# Altium PCB H_bridge_PCB.PcbDoc
Units mm, origin at the board's own origin, x right, y up, seen from the top; angles counter-clockwise.
Board outline 95.88 x 101.6 mm, 2 copper layers (Top Layer, Bottom Layer); 43 components, 40 nets, 147 pads, 6 vias.
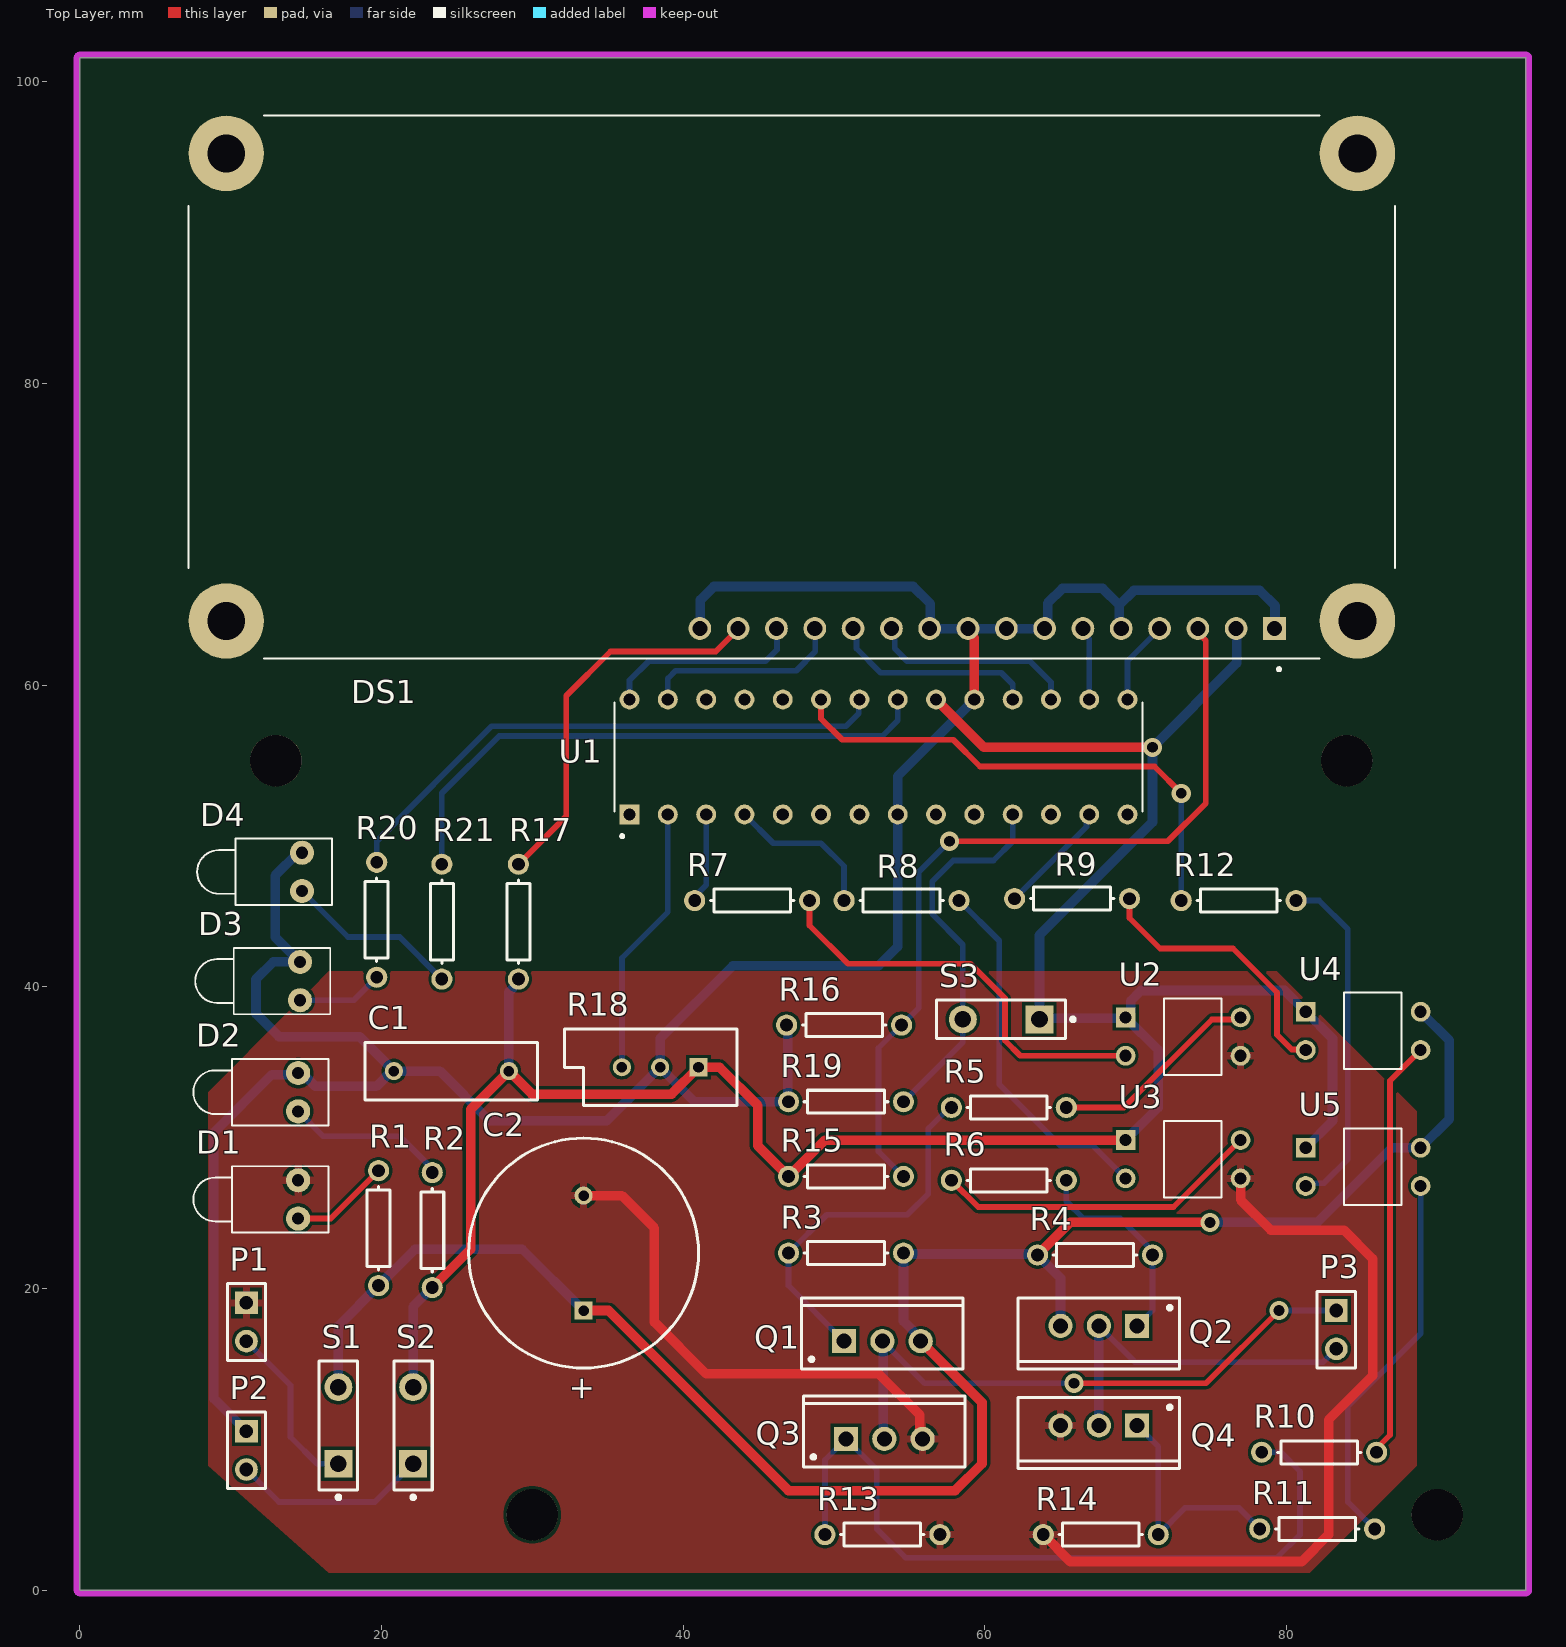
[diagram p0: Top Layer view]
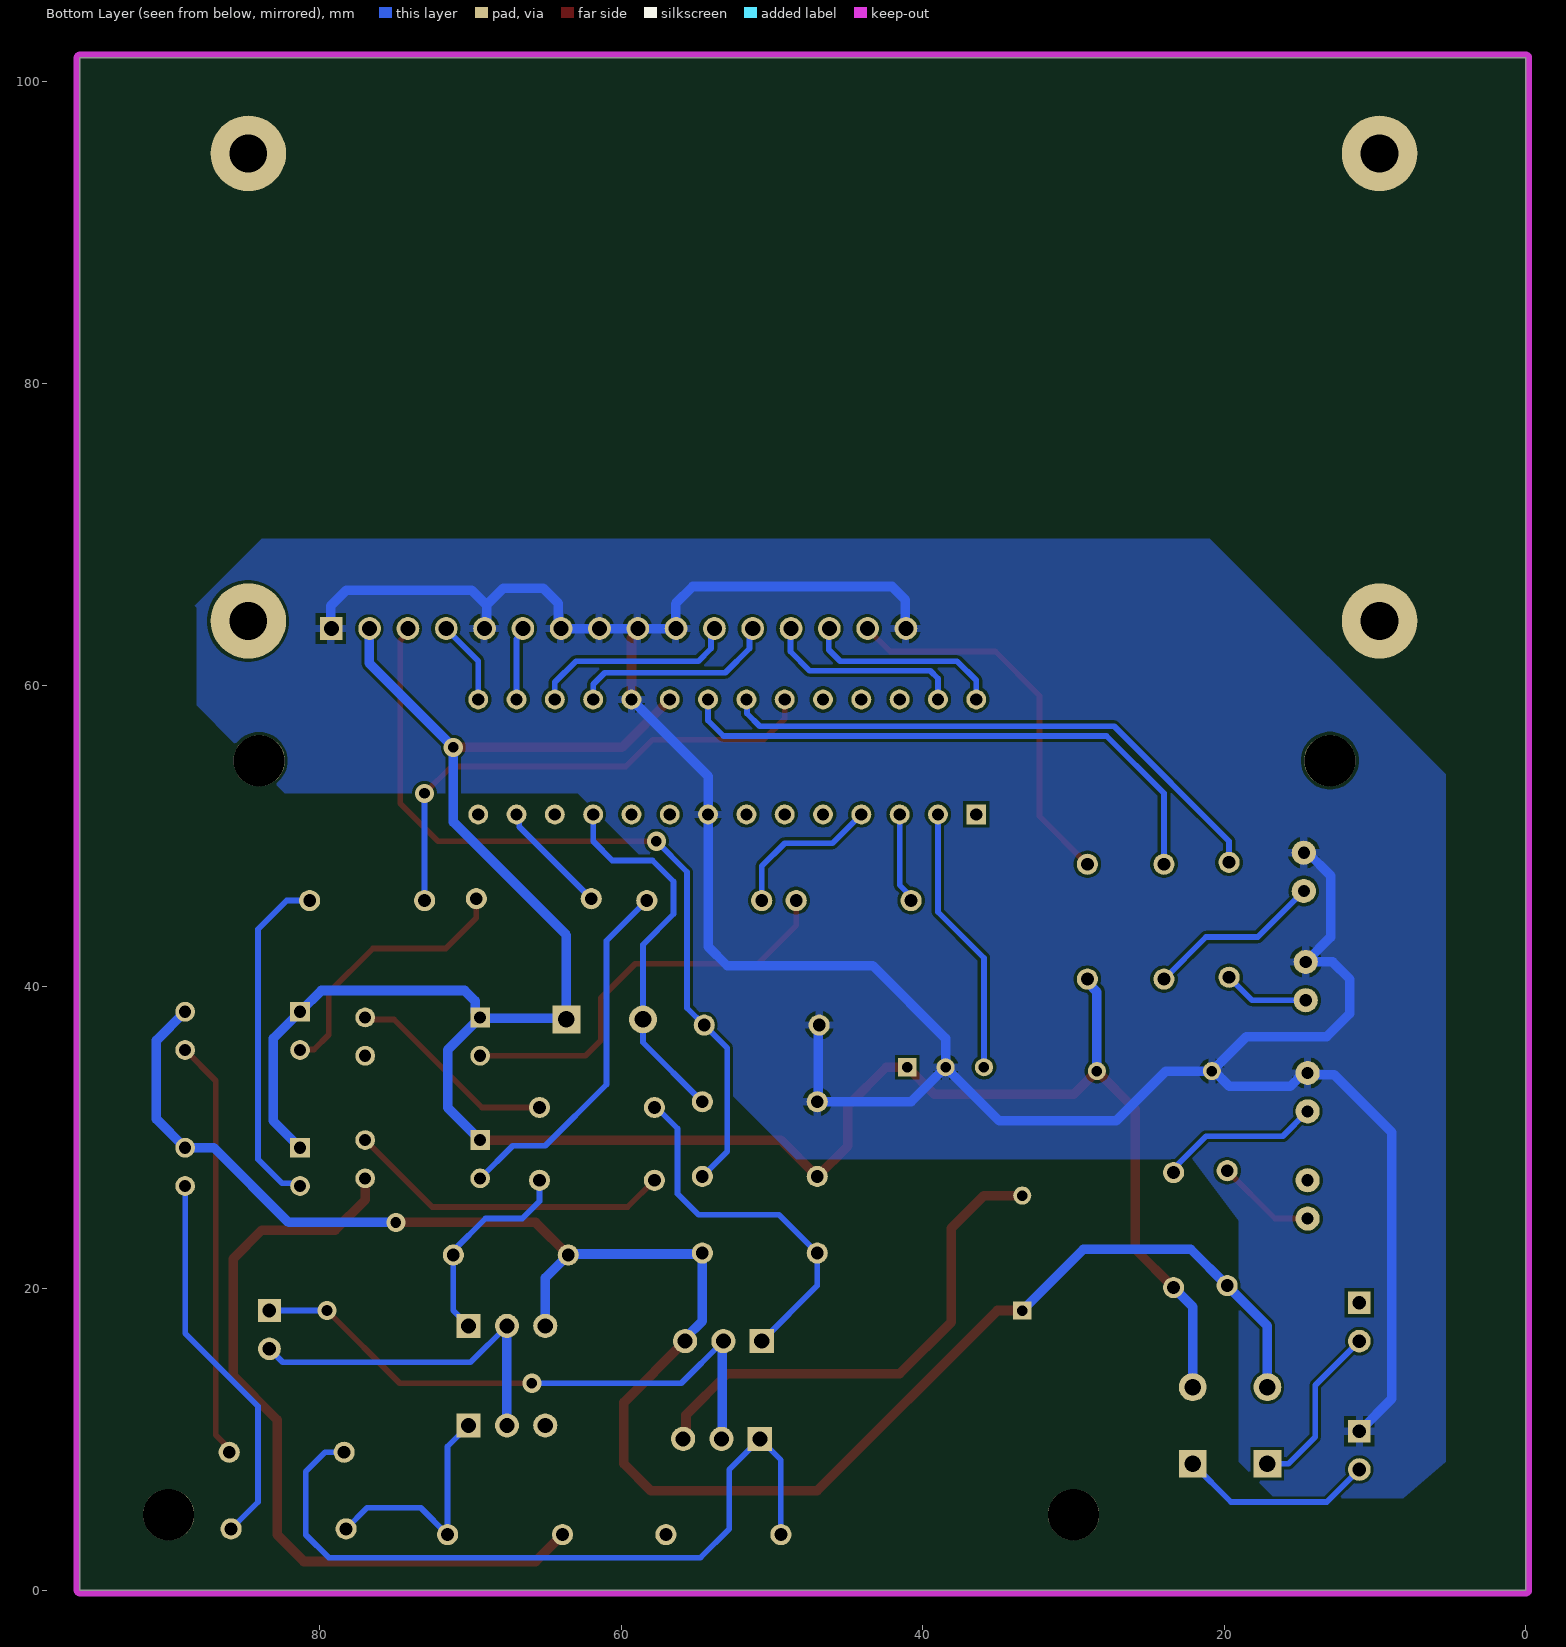
[diagram p1: Bottom Layer view, seen from below]

## Layer stack, top to bottom
Top Solder: solder mask 0.0102, Solder Resist, Dk 3.5
Top Layer: signal copper 0.0356
Dielectric 1: dielectric 0.32, FR-4, Dk 4.8
Bottom Layer: signal copper 0.0356
Bottom Solder: solder mask 0.0102, Solder Resist, Dk 3.5

## Board outline
0,0 95.885,0 95.885,101.6 0,101.6

## Design rules (kind name [scope] priority, off if disabled: settings)
BoardOutlineClearance [All] p1: gap=0.2 ignorepadtopadclearanceinfootprint=FALSE except(0.4: Arc-SplitBarrior Arc-SplitContinuation Track-SplitBarrior Track-SplitContinuation SMDPad-SplitBarrior SMDPad-SplitContinuation THPad-SplitBarrior THPad-SplitContinuation Via-SplitBarrior Via-SplitContinuation Fill-SplitBarrior Fill-SplitContinuation Poly-SplitBarrior Poly-SplitContinuation Region-SplitBarrior Region-SplitContinuation Text-SplitBarrior Text-SplitContinuation)
Clearance "Clearance Bottom Layer" [OnLayer('Bottom Layer')] p1: gap=0.203 ignorepadtopadclearanceinfootprint=TRUE except(0.254: Arc-Text Track-Text SMDPad-Text THPad-Text Via-Text Fill-Text Poly-Text Region-Text Text-Text)
Clearance "Clearance Top Layer" [OnLayer('Top Layer')] p2: gap=0.203 ignorepadtopadclearanceinfootprint=TRUE except(0.254: Arc-Text Track-Text SMDPad-Text THPad-Text Via-Text Fill-Text Poly-Text Region-Text Text-Text)
Clearance [All] p3: gap=0.2 ignorepadtopadclearanceinfootprint=FALSE except(0.089: Arc-Arc Arc-Track Arc-SMDPad Track-Track Track-SMDPad SMDPad-SMDPad; 0.127: Arc-Via Track-Via SMDPad-Via THPad-Via Via-Via; 0.254: Arc-Text Track-Text SMDPad-Text THPad-Text Via-Text Fill-Text Poly-Text Region-Text Text-Text)
HoleSize [All] p1: absolutevalues=TRUE maxlimit=6.3 minlimit=0.2 maxpercent=80.000 minpercent=20.000
MinimumAnnularRing [All] p1: minimumring=0.076
MinimumSolderMaskSliver [All] p1: minsoldermaskwidth=0.1
PolygonConnect PolygonConnect_1 [All] p1: thpad.connectstyle=Relief thpad.reliefconductorwidth=0.508 thpad.reliefentries=4 thpad.polygonreliefangle="90 Angle" thpad.airgapwidth=0.254 smdpad.connectstyle=Relief smdpad.reliefconductorwidth=0.508 smdpad.reliefentries=4 smdpad.polygonreliefangle="90 Angle" smdpad.airgapwidth=0.254 via.connectstyle=Direct via.reliefconductorwidth=0.508 via.reliefentries=4 via.polygonreliefangle="90 Angle" via.airgapwidth=0.254
RoutingVias [All] p1: holewidth=0.711 width=1.27 viastyle="Through Hole" minholewidth=0.203 minwidth=0.406 maxholewidth=0.711 maxwidth=1.27
SilkToSilkClearance [All] p1: silktosilkclearance=0.1
SilkToSolderMaskClearance [IsPad] p1: minsilkscreentomaskgap=0.1 clearancetoexposedcopper=TRUE
SolderMaskExpansion [All] p1: expansion=0.102 istentingtop=FALSE
Width POWER [InNetClass('POWER')] p1: maxlimit=0.635 minlimit=0.127 preferedwidth=0.635 minimp=50.000000 maximp=50.000000 favimp=50.000000
Width [InNetClass('SIGNALS')] p2: maxlimit=0.635 minlimit=0.127 preferedwidth=0.381 minimp=50.000000 maximp=50.000000 favimp=50.000000
26 further rules are at their usual default settings.

## Classes and differential pairs
net class SIGNALS: LCD_D4 LCD_D5 LCD_D6 LCD_D7 LCD_EN LCD_RS NetD1_1 NetD2_1 NetD3_1 NetD4_1 NetDS1_3 NetDS1_15 NetP1_2 NetP2_2 NetQ1_1 NetQ2_1 NetQ3_1 NetQ4_1 NetR5_1 NetR6_1 NetR7_1 NetR7_2 NetR8_1 NetR8_2 NetR9_1 NetR9_2 NetR10_2 NetR11_2 NetR12_1 NetR12_2 NetR18_3 NetR19_2 NetR20_2 NetR21_2
net class POWER: +5 +12 GND MCUGND NetP3_1 NetP3_2
net class LCD_D[4..7]: LCD_D4 LCD_D5 LCD_D6 LCD_D7
component class "U_Power Supply": D1 D2 P1 P2 R1 R2 S1 S2
component class U_Microcontroller: C1 U1
component class U_H_bridge: C2 Q1 Q2 Q3 Q4 R3 R4 R5 R6 R7 R8 R9 R10 R11 R12 R13 R14 U2 U3 U4 U5
component class Top_level: D3 D4 DS1 P3 R15 R16 R17 R18 R19 R20 R21 S3

## Components (designator, comment, footprint, x,y, rotation, side; value= is the part's Value field where it differs from the comment)
C1 "Cap" RAD-0.3 24.638,34.417 r0 top value=0.1uF
C2 "Cap Pol1" RB7.6-15 33.401,22.352 r270 top value="100uF / 25V"
D1 "POWER LED" LED-1 14.478,25.908 r180 top
D2 "5V LED" LED-1 14.478,33.02 r180 top
D3 "LED1" LED-1 14.605,40.386 r180 top
D4 "LED1" LED-1 14.732,47.625 r180 top
DS1 "LCD2X16" LCD_LCD2X16 47.209,79.762 r180 top
P1 "12VIN" HDR1X2 11.049,19.05 r270 top
P2 "5VIN" HDR1X2 11.049,10.541 r270 top
P3 "OUTPUT" HDR1X2 83.312,18.542 r270 top
Q1 "IRF4905" TO-220AB 53.213,16.51 r0 top
Q2 "IRF4905" TO-220AB 67.564,17.526 r180 top
Q3 "IRLZ44n" TO-220AB 53.34,10.033 r0 top
Q4 "IRLZ44n" TO-220AB 67.564,10.922 r180 top
R1 "Res1" AXIAL-0.3 19.812,24.003 r270 top value=510R
R2 "Res1" AXIAL-0.3 23.368,23.876 r270 top value=330R
R3 "Res1" AXIAL-0.3 50.8,22.352 r0 top value=470R
R4 "Res1" AXIAL-0.3 67.31,22.225 r180 top value=470R
R5 "Res1" AXIAL-0.3 61.595,32.004 r180 top value=750R
R6 "Res1" AXIAL-0.3 61.595,27.178 r0 top value=750R
R7 "Res1" AXIAL-0.3 44.577,45.72 r0 top value=330R
R8 "Res1" AXIAL-0.3 54.483,45.72 r0 top value=330R
R9 "Res1" AXIAL-0.3 65.786,45.847 r180 top value=330R
R10 "Res1" AXIAL-0.3 82.169,9.144 r0 top value=750R
R11 "Res1" AXIAL-0.3 82.042,4.064 r0 top value=750R
R12 "Res1" AXIAL-0.3 76.835,45.72 r180 top value=330R
R13 "Res1" AXIAL-0.3 53.213,3.683 r0 top value=470R
R14 "Res1" AXIAL-0.3 67.691,3.683 r180 top value=470R
R15 "Res1" AXIAL-0.3 50.8,27.432 r0 top value=1K
R16 "Res1" AXIAL-0.3 50.673,37.465 r0 top value=1K
R17 "Res1" AXIAL-0.3 29.083,44.323 r90 top value=100R
R18 "RPot" VR5 38.481,34.671 r180 top value=10K
R19 "Res1" AXIAL-0.3 50.8,32.385 r0 top value=10K
R20 "Res1" AXIAL-0.3 19.685,44.45 r90 top value=330R
R21 "Res1" AXIAL-0.3 24.003,44.323 r90 top value=330R
S1 "POWER SWITCH" SPST-2 17.145,10.922 r90 top
S2 "5V Switch" SPST-2 22.098,10.922 r90 top
S3 "DIR CTRL" SPST-2 61.087,37.846 r180 top
U1 "PIC16F886-I/SP" DIP762W46P254L3467H457Q28 52.959,55.245 r90 top
U2 "TLP521-1" TLP521-1 69.342,37.973 r0 top
U3 "TLP521-1" TLP521-1 69.342,29.845 r0 top
U4 "TLP521-1" TLP521-1 81.28,38.354 r0 top
U5 "TLP521-1" TLP521-1 81.28,29.337 r0 top

## Footprints (in the part's own frame and the unit in brackets; to place one, negate y for a bottom-side part, rotate by r counter-clockwise, add the part's x,y. Pads: shape width x height; smd on the part's side, far side on the other; paste and mask are expansions set on the pad)
AXIAL-0.3 [mm] "Axial Device, Thru-Hole; 2 Leads; 0.3 in Pin Spacing"
  round 1.4 hole 0.85: 1(-3.81,0) 2(3.81,0)
  silkscreen extent -2.77,-0.76 2.77,0.76
DIP762W46P254L3467H457Q28 [mil]
  rect 52x52 hole 32: 1(-150,650)
  round 52 hole 32: 2(-150,550) 3(-150,450) 4(-150,350) 5(-150,250) 6(-150,150) 7(-150,50) 8(-150,-50) 9(-150,-150) 10(-150,-250) 11(-150,-350) 12(-150,-450) 13(-150,-550) 14(-150,-650) 15(150,-650) 16(150,-550) 17(150,-450) 18(150,-350) 19(150,-250) 20(150,-150) 21(150,-50) 22(150,50) 23(150,150) 24(150,250) 25(150,350) 26(150,450) 27(150,550) 28(150,650)
  silkscreen extent -211,-689 143,689
HDR1X2 [mm] "Connector; Header; 2 Position"
  rect 1.5x1.5 hole 0.9: 1(0,0)
  round 1.5 hole 0.9: 2(2.54,0)
  silkscreen extent -1.27,-1.27 3.81,1.27
LCD_LCD2X16 [mm]
  rect 1.508x1.508 hole 1: 1(-32,16)
  round 1.508 hole 1: 2(-29.46,16) 3(-26.92,16) 4(-24.38,16) 5(-21.84,16) 6(-19.3,16) 7(-16.76,16) 8(-14.22,16) 9(-11.68,16) 10(-9.14,16) 11(-6.6,16) 12(-4.06,16) 13(-1.52,16) 14(1.02,16) 15(3.56,16) 16(6.1,16)
  round 5 hole 2.5: S1(-37.5,15.5) S2(37.5,15.5) S3(37.5,-15.5) S4(-37.5,-15.5)
  silkscreen extent -40,-18 40,18.8
LED-1 [mm] "LED; 2 Leads"
  round 1.6 hole 0.8: 1(0,1.27) 2(0,-1.27)
  silkscreen extent -2,-2.2 6.95,2.2
RAD-0.3 [mm] "Radial Cap, Thru-Hole; 2 Leads; 0.3 in Pin Spacing"
  round 1.2 hole 0.7: 1(-3.81,0) 2(3.81,0)
  silkscreen extent -5.71,-1.91 5.71,1.91
RB7.6-15 [mm] "Polarized Capacitor (Radial); 2 Leads"
  rect 1.2x1.2 hole 0.7: 1(3.81,0)
  round 1.2 hole 0.7: 2(-3.81,0)
  silkscreen extent -7.62,-7.62 7.62,7.62
SPST-2 [mm] "Switch; 2 Leads"
  rect 1.85x1.85 hole 1.1: 1(-2.54,0)
  round 1.85 hole 1.1: 2(2.54,0)
  silkscreen extent -4.89,-1.27 4.28,1.27
TLP521-1 [mm]
  rect 1.308x1.308 hole 0.8: P$1(0,0)
  round 1.308 hole 0.8: P$2(0,-2.54) P$3(7.62,-2.54) P$4(7.62,0)
  silkscreen extent 2.54,-3.81 6.35,1.27
TO-220AB [mm] "TO, Thru-Hole, Vertical, Heatsink Mounted; 3 In-Line Leads; Pitch 2.54 mm"
  rect 1.6x1.6 hole 1: 1(-2.54,0)
  round 1.6 hole 1: 2(0,0) 3(2.54,0)
  silkscreen extent -5.35,-1.85 5.35,2.85, body extent -5.4,-1.9 5.4,2.9, height 19.3
VR5 [mm] "Thru-Hole; 3 Leads"
  rect 1.2x1.2 hole 0.7: 1(-2.54,0)
  round 1.2 hole 0.7: 2(0,0) 3(2.54,0)
  silkscreen extent -5.08,-2.54 6.35,2.54

## Part data
C1: "Capacitor", LatestRevisionDate=17-Jul-2002, LatestRevisionNote="Re-released for DXP Platform.", PackageDescription="Radial Cap, Thru-Hole; 2 Leads; 0.3 in Pin Spacing", PackageReference=RAD-0.3, Published=8-Jun-2000, Publisher="Altium Limited"
C2: "Polarized Capacitor (Radial)", LatestRevisionDate=17-Jul-2002, LatestRevisionNote="Re-released for DXP Platform.", PackageDescription="Polarized Capacitor (Radial); 2 Leads", PackageReference=RB7.6-15, Published=8-Jun-2000, Publisher="Altium Limited"
D1 D2: library part LED1, "Typical RED GaAs LED", LatestRevisionDate=08-Jul-2005, LatestRevisionNote="Mech Layer 1 removed.", PackageDescription="LED; 2 Leads", PackageReference=LED-1, Published=8-Jun-2000, Publisher="Altium Limited"
D3 D4: "Typical RED GaAs LED", LatestRevisionDate=08-Jul-2005, LatestRevisionNote="Mech Layer 1 removed.", PackageDescription="LED; 2 Leads", PackageReference=LED-1, Published=8-Jun-2000, Publisher="Altium Limited"
DS1: "Display; Display: LCD 2x16 characters (blue backlight)", Package=None, Availability=Unavailable, MF=mikroElektronika, MP=LCD2X16, Price=None, SnapEDA_Link=https://www.snapeda.com/parts/LCD2X16/mikroElektronika/view-part/2472530/?ref=snap
P1 P2 P3: library part "Header 2", "Header, 2-Pin", LatestRevisionDate=17-Jul-2002, LatestRevisionNote="Re-released for DXP Platform.", Publisher="Altium Limited"
Q1 Q2: library part PMOS-2, "P-Channel Power MOSFET", ComponentLink1Description="Manufacturer Link", ComponentLink1URL=http://www.irf.com/, DatasheetVersion=PD-9.390D, LatestRevisionDate=17-Jul-2002, LatestRevisionNote="Re-released for DXP Platform.", Note="Pin 4 not drawn and electrically connected to Pin 2.", PackageDescription="TO, Thru-Hole, Vertical, Heatsink Mounted; 3 In-Line Leads; Pitch 2.54 mm", PackageReference=TO-220AB, PackageVersion=Feb-1997, Published=8-Jun-2000, Publisher="Altium Limited"
Q3 Q4: library part NMOS-2, "N-Channel Power MOSFET", ComponentLink1Description="Manufacturer Link", ComponentLink1URL=http://www.irf.com/, DatasheetVersion=PD-9.814, LatestRevisionDate=17-Jul-2002, LatestRevisionNote="Re-released for DXP Platform.", Note="Pin 2 is electrically connected to pin 4.", PackageDescription="TO, Thru-Hole, Vertical, Heatsink Mounted; 3 In-Line Leads; Pitch 2.54 mm", PackageReference=TO-220AB, PackageVersion=Feb-1997, Published=8-Jun-2000, Publisher="Altium Limited"
R1 R2 R3 R4 R5 R6 R7 R8 R9 R10 R11 R12 R13 R14 R15 R16 R17 R19 R20 R21: "Resistor", LatestRevisionDate=17-Jul-2002, LatestRevisionNote="Re-released for DXP Platform.", PackageDescription="Axial Device, Thru-Hole; 2 Leads; 0.3 in Pin Spacing", PackageReference=AXIAL-0.3, Published=8-Jun-2000, Publisher="Altium Limited"
R18: "Potentiometer", LatestRevisionDate=17-Jul-2002, LatestRevisionNote="Re-released for DXP Platform.", PackageDescription="Variable Resistor, Thru-Hole; 3 Leads", PackageReference=VR5, Published=8-Jun-2000, Publisher="Altium Limited", Set Position=0.5, Sim Note="Enter the Resistance value and the set point into parameter fields."
S1 S2 S3: library part SW-SPST, "Single-Pole, Single-Throw Switch", LatestRevisionDate=17-Jul-2002, LatestRevisionNote="Re-released for DXP Platform.", PackageDescription="Switch; 2 Leads", PackageReference=SPST-2, Published=24-Mar-1999, Publisher="Altium Limited"
U1: "PIC PICÂ® 16F Microcontroller IC 8-Bit 20MHz 14KB _8K x 14_ FLASH 28-SPDIP", Package="DIP-28 Microchip", Availability=Unavailable, MF=Microchip, MP=PIC16F886-I/SP, Price=None, SnapEDA_Link=https://www.snapeda.com/parts/PIC16F886-I/SP/Microchip/view-part/44176/?ref=snap
U2 U3 U4 U5: "ICM006", Package=None, Availability=Unavailable, MF=Isocom, MP=TLP521-1, Price=None, SnapEDA_Link=https://www.snapeda.com/parts/TLP521-1/Isocom/view-part/918682/?ref=snap

## Free pads (board coordinates)
  round 3.4 hole 3.4 unplated: 1(30,5) 2(13,55) 3(84,55)
  round 3.4 hole 3.4: 4(90,5)

## Via types
v1: diameter 1.27, hole 0.711, Top Layer to Bottom Layer, 6 vias

## Nets (pads, with @x,y where several pads share a name; then routed paths per layer and width w, separated by ;. In a path a pad name is that pad's centre, name@x,y a point inside that pad or via, vN(x,y) a via of type N, cw(c..) or ccw(c..) an arc to the next point about the centre after c; other vN are vias at no path point)
+5: C1.2 DS1.2 R2.2 R15.1 R17.1 R18.1 S2.2 S3.1 U1.20 U2.P$1 U3.P$1 U4.P$1 U5.P$1 | length 164.7
  Top Layer w0.635: R2.2 25.908,22.606 25.908,31.877 C1.2 29.972,32.893 39.243,32.893 R18.1 42.418,34.671 44.958,32.131 44.958,29.464 R15.1 49.403,29.845 U3.P$1 ; U1.20 59.944,55.88 v1(71.12,55.88)
  Bottom Layer w0.381: R2.2 R2.2@23.378,20.056
  Bottom Layer w0.635: S2.2 22.098,18.796 R2.2 ; C1.2 28.448,39.671 29.083,40.306 R17.1 ; U3.P$1 71.501,32.004 71.501,35.814 U2.P$1 ; DS1.2@76.704,63.756 76.704,61.464 v1(71.12,55.88) 71.12,50.927 63.627,43.434 S3.1 63.691,37.91 69.278,37.91 U2.P$1 ; U5.P$1 83.058,31.115 83.058,36.576 U4.P$1 79.874,39.76 70.367,39.76 69.679,39.072 69.679,38.31 U2.P$1
+12: C2.1 Q1.3 Q2.3 R1.2 R3.2 R4.2 S1.2 U4.P$4 U5.P$4 | length 125.5
  Top Layer w0.635: C2.1 35.052,18.542 46.99,6.604 58.039,6.604 59.817,8.382 59.817,12.446 Q1.3 ; R4.2 65.659,24.384 v1(74.93,24.384)
  Bottom Layer w0.635: S1.2 17.145,17.526 R1.2 22.225,22.606 29.337,22.606 C2.1 ; Q1.3 55.753,16.702 54.61,17.845 R3.2 54.673,22.288 63.436,22.288 R4.2 65.024,20.701 Q2.3 ; v1(74.93,24.384) 82.042,24.384 86.995,29.337 U5.P$4 90.805,31.242 90.805,36.449 U4.P$4
GND: C2.2 D1.2 P1.1 Q3.3 Q4.3 R13.2 R14.2 U2.P$3 U3.P$3 | length 86.4
  Top Layer w0.635: C2.2 35.941,26.162 38.1,24.003 38.1,17.78 41.529,14.351 52.959,14.351 55.695,11.615 55.695,10.218 Q3.3 ; R14.2 65.659,1.905 81.026,1.905 82.804,3.683 82.804,11.303 85.725,14.224 85.725,21.971 83.82,23.876 78.963,23.876 76.962,25.877 U3.P$3
  Bottom Layer w0.635: P1.1 P1.1@11.482,18.617 ; D1.2@14.293,26.993 D1.2 ; Q3.3@55.88,9.841 Q3.3 ; R14.2 R14.2@63.881,3.734
LCD_D4: DS1.11 U1.17 | length 13.8
  Bottom Layer w0.381: DS1.11@53.844,63.756 54.029,63.571 54.029,62.43 54.864,61.595 62.992,61.595 64.389,60.198 U1.17
LCD_D5: DS1.12 U1.18 | length 13.8
  Bottom Layer w0.381: DS1.12@51.304,63.756 51.489,63.571 51.489,62.43 53.086,60.833 61.087,60.833 61.849,60.071 U1.18
LCD_D6: DS1.13 U1.27 | length 13.4
  Bottom Layer w0.381: U1.27 38.989,60.452 39.497,60.96 47.498,60.96 48.768,62.23 48.768,63.752 DS1.13@48.764,63.756
LCD_D7: DS1.14 U1.28 | length 13.3
  Bottom Layer w0.381: U1.28 36.449,60.325 37.719,61.595 45.466,61.595 46.224,62.353 DS1.14@46.224,63.756
LCD_EN: DS1.6 U1.16 | length 4.9
  Bottom Layer w0.381: DS1.6@66.544,63.756 66.544,63.451 66.929,63.066 U1.16
LCD_RS: DS1.4 U1.15 | length 5.6
  Bottom Layer w0.381: U1.15 69.469,61.601 DS1.4@71.624,63.756
MCUGND: C1.1 D2.2 D3.2 D4.2 DS1.1 DS1.5 DS1.7 DS1.8 DS1.9 DS1.10 DS1.16 P2.1 R16.1 R18.2 R19.1 U1.8 U1.19 | length 187.8
  Top Layer w0.635: DS1.9@58.924,63.756 58.924,63.52 59.309,63.135 U1.19
  Bottom Layer w0.635: P2.1 8.89,12.7 8.89,30.353 12.725,34.188 14.376,34.188 D2.2 14.739,34.29 15.628,33.401 19.659,33.401 20.675,34.417 C1.1 ; D4.2 14.471,48.895 12.954,47.378 12.954,43.307 D3.2 12.827,41.656 11.684,40.513 11.684,38.227 13.208,36.703 18.542,36.703 C1.1 ; DS1.16@41.144,63.756 41.144,65.655 42.037,66.548 55.245,66.548 56.384,65.409 56.384,63.756 58.924,63.756 61.464,63.756 64.004,63.756 64.171,63.923 64.171,65.441 65.151,66.421 67.818,66.421 68.917,65.322 ; R16.1 46.926,37.401 46.926,32.448 R19.1 40.767,32.385 R18.2 ; U1.19 54.229,53.975 U1.8 54.229,42.672 52.959,41.402 43.307,41.402 38.481,36.576 R18.2 ; DS1.5@69.084,63.756 68.917,63.923 68.917,65.322 ; DS1.1@79.244,63.756 79.244,65.282 78.232,66.294 69.889,66.294 68.917,65.322 ; C1.1 23.876,34.417 27.178,31.115 34.925,31.115 R18.2
NetD1_1: D1.1 R1.1 | length 7
  Top Layer w0.381: D1.1 16.637,24.638 R1.1
  Bottom Layer w0.381: D1.1@14.478,24.308 D1.1
NetD2_1: D2.1 R2.1 | length 10.7
  Bottom Layer w0.381: D2.1 16.129,30.099 21.209,30.099 23.368,27.94 R2.1
NetD3_1: D3.1 R20.1 | length 5.7
  Bottom Layer w0.381: D3.1 18.161,39.116 R20.1
NetD4_1: D4.1 R21.1 | length 11.7
  Bottom Layer w0.381: D4.1 17.78,43.307 21.209,43.307 R21.1
NetDS1_3: DS1.3 R15.2 R16.2 | length 54.7
  Top Layer w0.381: v1(57.658,49.657) 72.136,49.657 74.645,52.166 74.645,62.97 74.164,63.451 DS1.3@74.164,63.756
  Bottom Layer w0.381: R15.2 52.959,29.083 52.959,35.941 R16.2 55.626,38.608 55.626,47.625 v1(57.658,49.657)
NetDS1_15: DS1.15 R17.2 | length 25.8
  Top Layer w0.381: R17.2 32.258,51.308 32.258,59.309 35.179,62.23 42.158,62.23 DS1.15@43.684,63.756
NetP1_2: P1.2 S1.1 | length 11.5
  Bottom Layer w0.381: P1.2 13.97,13.589 13.97,10.16 15.748,8.382 S1.1
NetP2_2: P2.2 S2.1 | length 13
  Bottom Layer w0.381: P2.2 13.208,5.842 19.558,5.842 S2.1
NetP3_1: P3.1 Q1.2 Q3.2 | length 39.7
  Top Layer w0.381: v1(65.913,13.716) 74.676,13.716 v1(79.502,18.542)
  Bottom Layer w0.381: Q1.2@53.276,16.447 56.007,13.716 v1(65.913,13.716) ; v1(79.502,18.542) P3.1
  Bottom Layer w0.635: Q1.2 53.276,16.447 53.276,10.096 Q3.2
NetP3_2: P3.2 Q2.2 Q4.2 | length 23.7
  Bottom Layer w0.381: Q2.2 69.977,15.113 82.423,15.113 P3.2
  Bottom Layer w0.635: Q4.2 Q2.2
NetQ1_1: Q1.1 R3.1 R5.2 | length 24.7
  Bottom Layer w0.381: Q1.1 46.99,20.193 R3.1 49.53,24.892 54.864,24.892 56.261,26.289 56.261,30.607 57.658,32.004 R5.2
NetQ2_1: Q2.1 R4.1 R6.2 | length 13.9
  Bottom Layer w0.381: R6.2 65.405,25.781 66.548,24.638 68.983,24.638 71.12,22.501 71.12,18.542 Q2.1
NetQ3_1: Q3.1 R10.1 R13.1 | length 50.5
  Bottom Layer w0.381: R13.1 49.403,8.636 Q3.1 52.832,8.001 52.832,4.064 54.737,2.159 79.375,2.159 80.899,3.683 80.899,7.874 79.631,9.142 78.361,9.142 R10.1
NetQ4_1: Q4.1 R11.1 R14.1 | length 15.9
  Bottom Layer w0.381: Q4.1 71.501,9.525 R14.1 73.279,5.461 76.835,5.461 R11.1
NetR5_1: R5.1 U2.P$4 | length 14
  Top Layer w0.381: R5.1 69.215,32.004 75.057,37.846 76.835,37.846 U2.P$4
NetR6_1: R6.1 U3.P$4 | length 21.8
  Top Layer w0.381: R6.1 59.563,25.4 72.517,25.4 U3.P$4
NetR7_1: R7.1 U1.3 | length 6
  Bottom Layer w0.381: R7.1 40.767,45.994 41.529,46.756 U1.3
NetR7_2: R7.2 U2.P$2 | length 27.8
  Top Layer w0.381: R7.2 48.387,44.069 50.927,41.529 59.055,41.529 61.341,39.243 61.341,36.449 62.357,35.433 U2.P$2
NetR8_1: R8.1 U1.4 | length 10.3
  Bottom Layer w0.381: U1.4 45.974,49.53 49.149,49.53 50.673,48.006 R8.1
NetR8_2: R8.2 U3.P$2 | length 24.3
  Bottom Layer w0.381: R8.2 60.96,43.053 60.96,33.528 65.024,29.464 67.183,29.464 U3.P$2
NetR9_1: R9.1 U4.P$2 | length 18.2
  Top Layer w0.381: R9.1 69.598,45.845 69.598,44.575 71.628,42.545 76.454,42.545 79.375,39.624 79.375,36.83 80.35,35.855 81.239,35.855 U4.P$2
NetR9_2: R9.2 U1.13 | length 7.6
  Bottom Layer w0.381: R9.2 66.749,50.62 66.749,51.255 U1.13
NetR10_2: R10.2 U4.P$3 | length 27.9
  Top Layer w0.381: R10.2 85.979,9.398 86.868,10.287 86.868,33.782 U4.P$3
NetR11_2: R11.2 U5.P$3 | length 25.5
  Bottom Layer w0.381: R11.2 84.074,5.842 84.074,12.192 88.9,17.018 U5.P$3
NetR12_1: R12.1 U5.P$2 | length 23
  Bottom Layer w0.381: R12.1 82.169,45.72 84.074,43.815 84.074,28.575 82.473,26.974 81.457,26.974 U5.P$2
NetR12_2: R12.2 U1.23 | length 34.3
  Top Layer w0.381: U1.23 49.149,57.785 50.546,56.388 57.912,56.388 59.69,54.61 71.247,54.61 v1(73.025,52.832)
  Bottom Layer w0.381: R12.2 v1(73.025,52.832)
NetR18_3: R18.3 U1.2 | length 18
  Bottom Layer w0.381: R18.3 35.941,41.91 38.989,44.958 U1.2
NetR19_2: R19.2 S3.2 U1.11 | length 25.3
  Bottom Layer w0.381: R19.2 58.547,36.322 S3.2 58.547,42.799 56.515,44.831 56.515,46.99 57.912,48.387 60.579,48.387 61.849,49.657 U1.11
NetR20_2: R20.2 U1.22 | length 37.8
  Bottom Layer w0.381: R20.2 19.685,49.657 27.305,57.277 50.8,57.277 51.643,58.12 51.643,59.009 U1.22
NetR21_2: R21.2 U1.21 | length 38.3
  Bottom Layer w0.381: R21.2 24.003,52.832 27.813,56.642 53.213,56.642 54.229,57.658 U1.21
pads on no net: DS1.S1 DS1.S2 DS1.S3 DS1.S4 U1.1 U1.5 U1.6 U1.7 U1.9 U1.10 U1.12 U1.14 U1.24 U1.25 U1.26

## Polygon pours and split planes (outlines as drawn)
GND on Top Layer "GND_PLANE" (solid, remove dead copper, pour order 1): 8.509,27.686 8.509,8.255 16.51,1.143 81.534,1.143 88.646,8.255 88.646,31.75 79.375,41.021 16.51,41.021 8.509,33.02
MCUGND on Bottom Layer "MCUGND_PLANE" (solid, remove dead copper, pour order 0): 16.637,6.096 8.128,6.096 5.334,8.509 5.334,54.102 20.955,69.723 83.82,69.723 88.265,65.278 88.138,65.151 88.138,58.674 82.296,52.832 62.865,52.832 56.642,46.609 56.642,36.83 48.387,28.575 22.098,28.575 19.05,24.511 19.05,8.509

## Keep-outs
Keep-Out Layer:
  lines w0.406: -0.203,0 ccw(c0,0) 0,-0.203 ; -0.203,0 ccw(c0,0) 0,-0.203 ; -0.203,0 -0.203,101.6 ; -0.203,101.6 cw(c0,101.6) 0,101.803 ; -0.203,101.6 cw(c0,101.6) 0,101.803 ; 0,-0.203 95.885,-0.203 ; 0,101.803 95.885,101.803 ; 95.885,-0.203 ccw(c95.885,0) 96.088,0 ; 95.885,-0.203 ccw(c95.885,0) 96.088,0 ; 95.885,101.803 cw(c95.885,101.6) 96.088,101.6 ; 95.885,101.803 cw(c95.885,101.6) 96.088,101.6 ; 96.088,0 96.088,101.6

## Silkscreen, mask and mechanical layers (free items; w line width, h text height)
Route Tool Path:
  lines w0.203: -0.102,0 ccw(c0,0) 0,-0.102 ; -0.102,0 ccw(c0,0) 0,-0.102 ; -0.102,0 ccw(c0,0) 0,-0.102 ; -0.102,0 ccw(c0,0) 0,-0.102 ; -0.102,0 -0.102,101.6 ; -0.102,0 -0.102,101.6 ; -0.102,101.6 cw(c0,101.6) 0,101.702 ; -0.102,101.6 cw(c0,101.6) 0,101.702 ; -0.102,101.6 cw(c0,101.6) 0,101.702 ; -0.102,101.6 cw(c0,101.6) 0,101.702 ; 0,-0.102 95.885,-0.102 ; 0,-0.102 95.885,-0.102 ; 0,101.702 95.885,101.702 ; 0,101.702 95.885,101.702 ; 95.885,-0.102 ccw(c95.885,0) 95.987,0 ; 95.885,-0.102 ccw(c95.885,0) 95.987,0 ; 95.885,-0.102 ccw(c95.885,0) 95.987,0 ; 95.885,-0.102 ccw(c95.885,0) 95.987,0 ; 95.885,101.702 cw(c95.885,101.6) 95.987,101.6 ; 95.885,101.702 cw(c95.885,101.6) 95.987,101.6 ; 95.885,101.702 cw(c95.885,101.6) 95.987,101.6 ; 95.885,101.702 cw(c95.885,101.6) 95.987,101.6 ; 95.987,0 95.987,101.6 ; 95.987,0 95.987,101.6 ; 3.454,0 ccw(c3.556,0) 3.556,-0.102 cw(c3.556,0) 3.454,0 ; 3.454,101.6 cw(c3.556,101.6) 3.556,101.702 ccw(c3.556,101.6) 3.454,101.6

## Text inside footprints (layer, text, board x,y; h text height)
C2: Top Overlay "+" at 32.664,14.22 h1.5 r270